# Altium PCB MP3_Player.PcbDoc
Units mil, origin at the board's own origin, x right, y up, seen from the top; angles counter-clockwise.
Board outline 2362.2 x 984.25 mil, 4 copper layers (Top Layer, Int1 (GND), Int2 (PWR), Bottom Layer), stack 62.449 mil thick; 70 components, 45 nets, 191 pads, 75 vias.
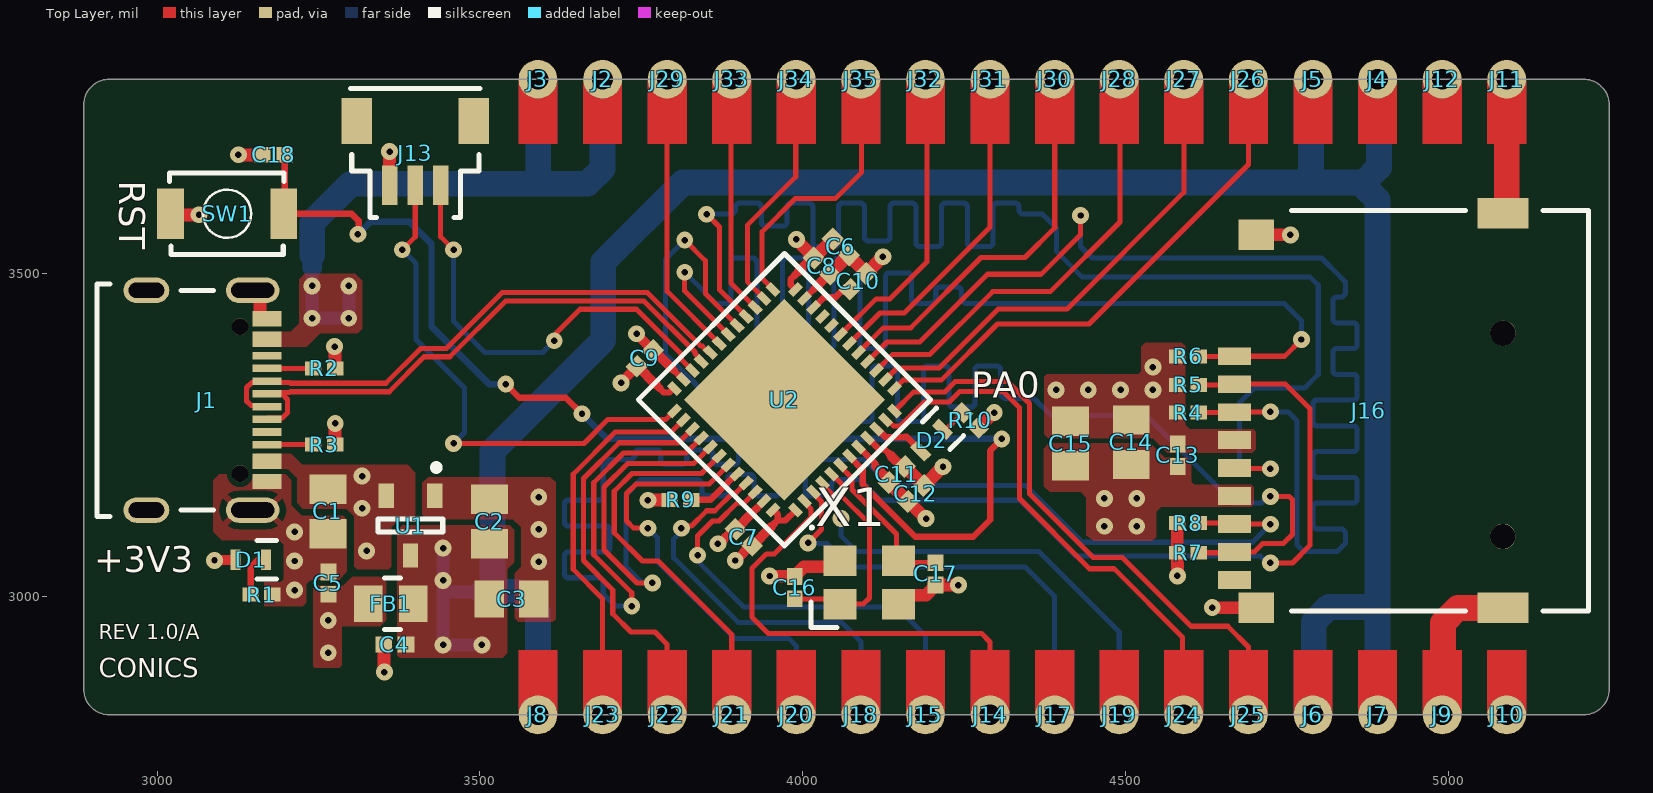
[diagram p0: Top Layer view]
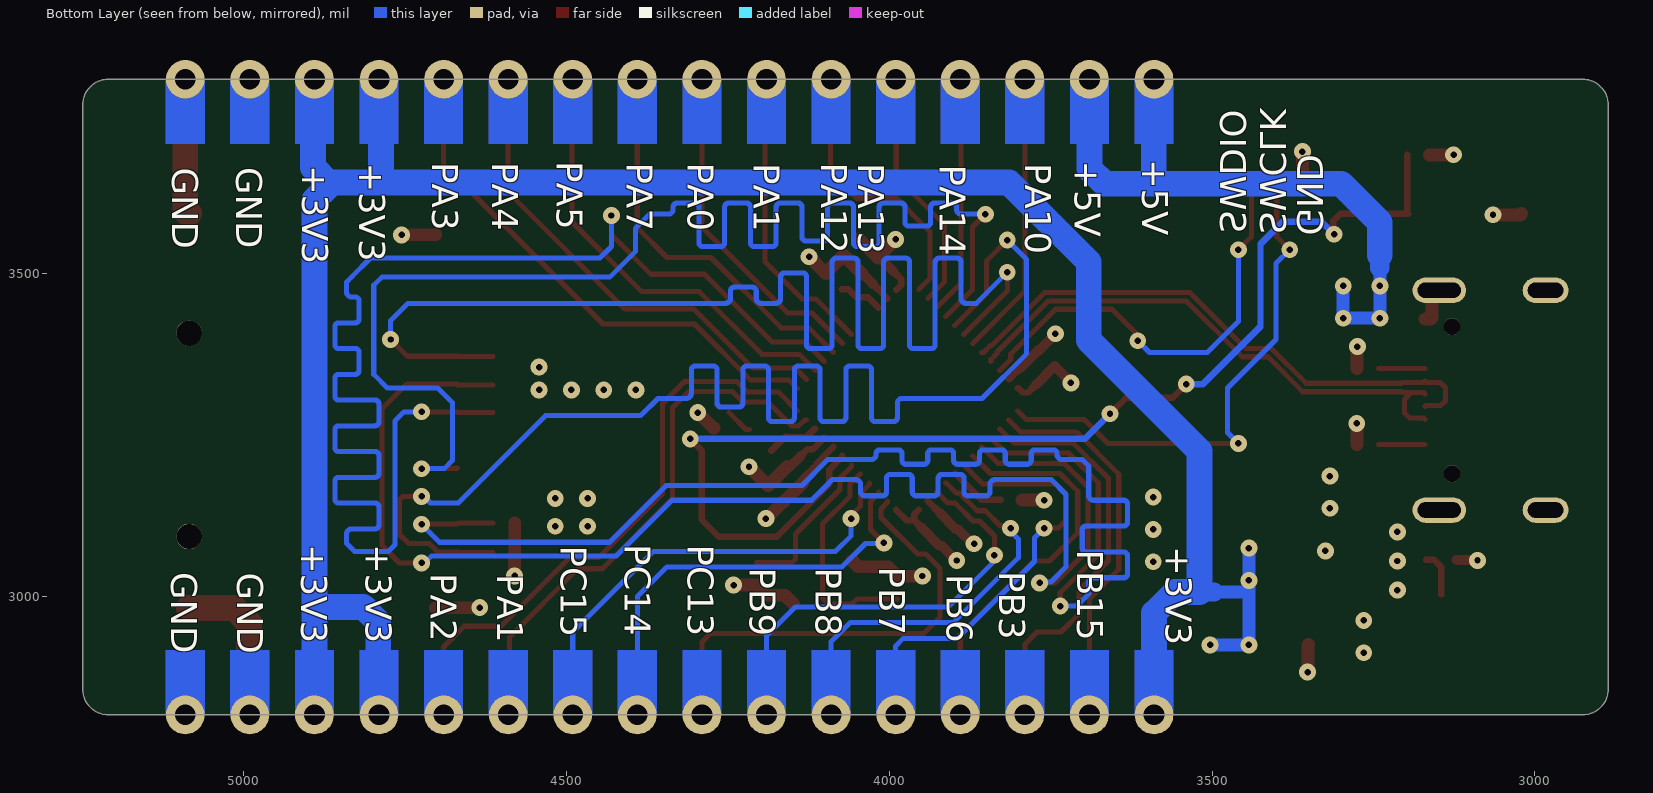
[diagram p1: Bottom Layer view, seen from below]
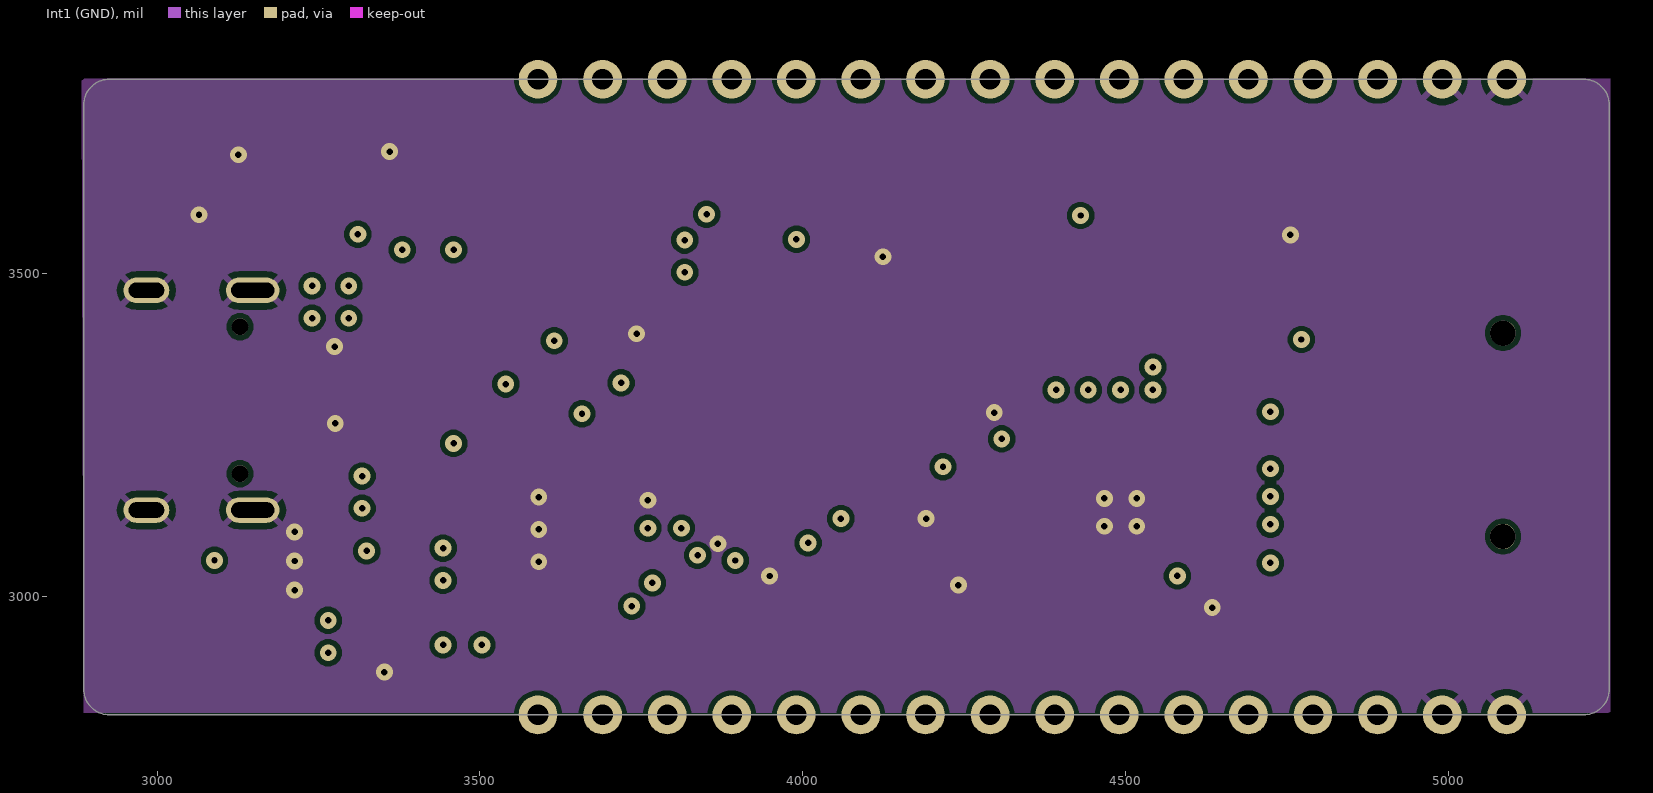
[diagram p2: Int1 (GND)]
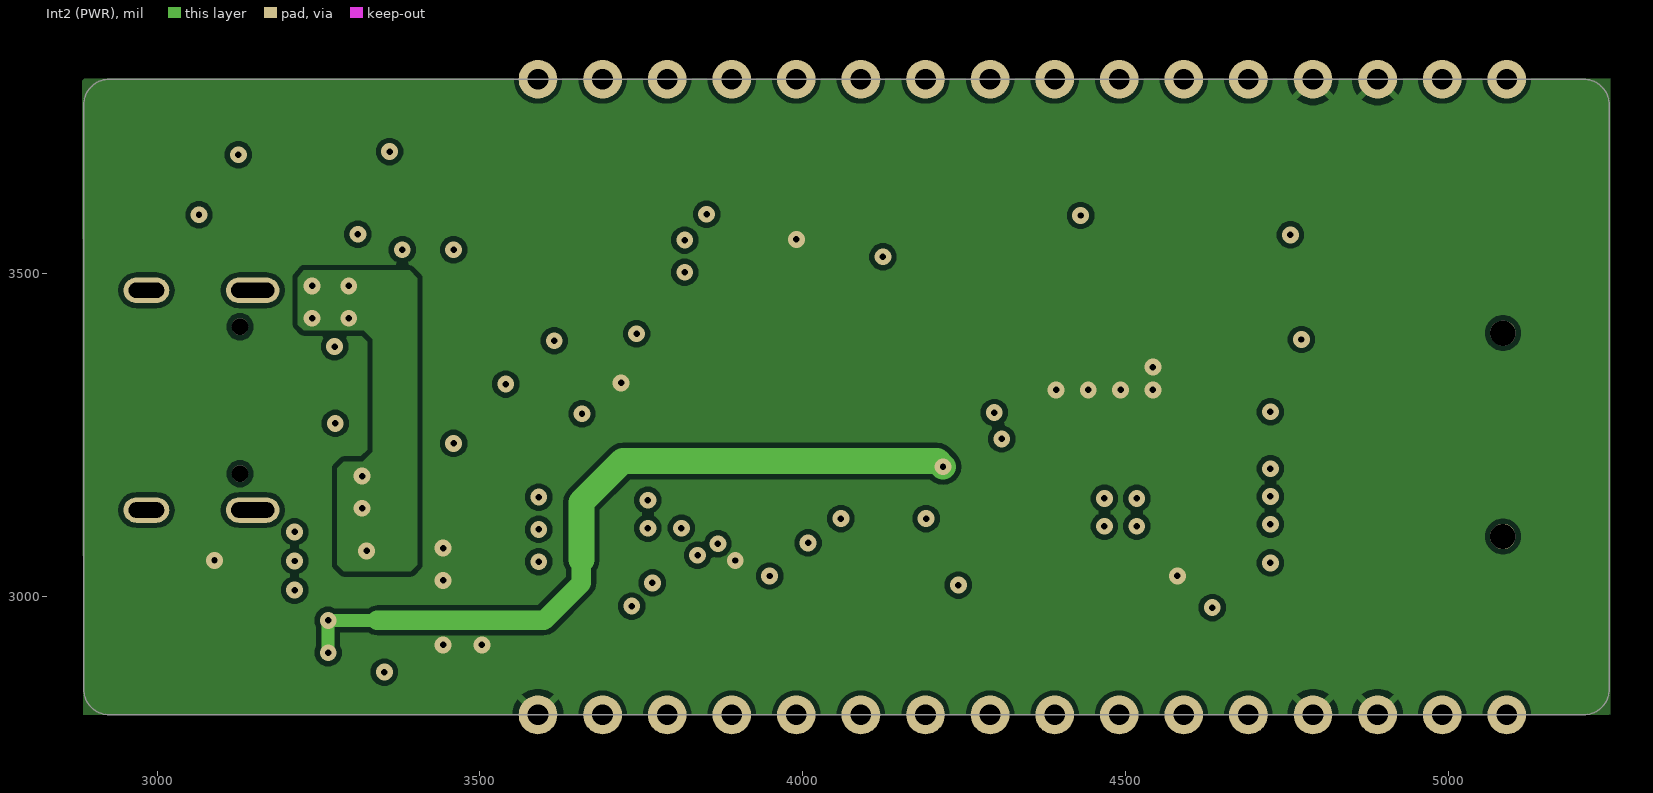
[diagram p3: Int2 (PWR)]

## Layer stack, top to bottom
Top Solder: solder mask 1.2, SM-001, Dk 3.8
Top Layer: signal copper 1.378
Dielectric 2: prepreg 8.2835, 7628, Dk 4.4
Int1 (GND): signal copper 0.5984
Dielectric 3: core 41.9291, Core-039, Dk 4.6
Int2 (PWR): signal copper 0.5984
Dielectric 5: prepreg 8.2835, 7628, Dk 4.4
Bottom Layer: signal copper 1.378
Bottom Solder: solder mask 1.2, SM-001, Dk 3.8

## Board outline
2886.47,2856.8 2886.47,3761.05 cw(c2926.47,3761.05) 2926.47,3801.05 5208.67,3801.05 cw(c5208.67,3761.05) 5248.67,3761.05 5248.67,2856.8 cw(c5208.67,2856.8) 5208.67,2816.8 2926.47,2816.8 cw(c2926.47,2856.8)

## Design rules (kind name [scope] priority, off if disabled: settings)
Clearance USBBus [InNet('USB*')] p1: gap=5 ignorepadtopadclearanceinfootprint=FALSE
Clearance [All] p2: gap=7.87 ignorepadtopadclearanceinfootprint=TRUE
DiffPairsRouting [InNet('USB*')] p1: maxlimit=10 minlimit=5 mostfreqgap=10 toplayer_maxgap=5 toplayer_prefgap=5 toplayer_minwidth=8.02 toplayer_maxwidth=8.02 toplayer_prefwidth=8.02 bottomlayer_maxgap=5 bottomlayer_prefgap=5 bottomlayer_minwidth=8.02 bottomlayer_maxwidth=8.02 bottomlayer_prefwidth=8.02 impedanceprofiledriven=TRUE impedanceprofileid={C55F2798-AC22-4EFC-BF2A-CBAC94E6BBA1} impedanceprofilevalue=90.000000 maxuncoupledlength=500
MinimumSolderMaskSliver [InPadClass('All Pads') vs InPadClass('All Pads')] p1: minsoldermaskwidth=4
PlaneClearance [All] p1: clearance=10
PlaneConnect [All] p1: planeconnectstyle=Direct reliefexpansion=20 reliefentries=4 reliefconductorwidth=10 reliefairgap=10
PolygonConnect [All] p1: thpad.connectstyle=Relief thpad.reliefconductorwidth=10 thpad.reliefentries=4 thpad.polygonreliefangle="45 Angle" thpad.airgapwidth=10 smdpad.connectstyle=Direct smdpad.reliefconductorwidth=10 smdpad.reliefentries=4 smdpad.polygonreliefangle="90 Angle" smdpad.airgapwidth=10 via.connectstyle=Direct via.reliefconductorwidth=10 via.reliefentries=4 via.polygonreliefangle="90 Angle" via.airgapwidth=10
RoutingVias [All] p1: holewidth=26 width=26 viastyle="Through Hole" minholewidth=10 minwidth=26 maxholewidth=28 maxwidth=30
SilkToSolderMaskClearance [IsPad] p1: minsilkscreentomaskgap=6 clearancetoexposedcopper=TRUE
SolderMaskExpansion [All] p1: expansion=0 istentingtop=FALSE useseparateexpansions=TRUE expansionbottom=0 istentingbottom=FALSE
SupplyNets "Schematic Supply Nets_3" [InNet('+5')] p1: voltage=0.000
SupplyNets "Schematic Supply Nets_2" [InNet('+3V3')] p2: voltage=0.000
SupplyNets "Schematic Supply Nets_1" [InNet('GND')] p3: voltage=0.000
SupplyNets "Schematic Supply Nets" [InNet('+3V3A')] p4: voltage=0.000
UnRoutedNet [All] p1: checkbadconnections=TRUE
Width [All] p1: maxlimit=40 minlimit=5 preferedwidth=7.87
24 further rules are at their usual default settings.

## Classes and differential pairs
net class "SD Bus": SD_CLK SD_CMD SD_D0 SD_D1 SD_D2 SD_D3
differential pair USB_D: +USB_D_P -USB_D_N

## Components (designator, comment, footprint, x,y, rotation, side; value= is the part's Value field where it differs from the comment)
C1 "10u" CAP_MLCC_0805 3264.47,3131.8 r90 top
C2 "47u" CAP_MLCC_0805 3515,3116 r270 top
C3 "10u" CAP_MLCC_0805 3549,2996 r180 top
C4 "2p7" CAP_MLCC_0402#1 3368.28,2925.69 r0 top
C5 "2p7" CAP_MLCC_0402#1 3265.47,3020.8 r270 top
C6 "2u2" CAP_MLCC_0402#1 4058.86,3541.31 r135 top
C7 "100n" CAP_MLCC_0402#1 3908.47,3091.8 r315 top
C8 "100n" CAP_MLCC_0402#1 4029.33,3511.78 r135 top
C9 "100n" CAP_MLCC_0402#1 3755.47,3368.8 r225 top
C10 "2u2" CAP_MLCC_0402#2 4085.47,3488.08 r225 top
C11 "100n" CAP_MLCC_0402#1 4145.44,3188.98 r45 top
C12 "2u2" CAP_MLCC_0402#1 4174.97,3159.45 r45 top
C13 "100n" CAP_MLCC_0402#1 4580.47,3218.8 r90 top
C14 "47u" CAP_MLCC_0805 4508.47,3238.8 r90 top locked
C15 "47u" CAP_MLCC_0805 4414.47,3236.8 r90 top locked
C16 "12p" CAP_MLCC_0402#1 3987.47,3013.8 r270 top
C17 "12p" CAP_MLCC_0402#1 4205.51,3035.09 r90 top
C18 "2u2" CAP_MLCC_0402#1 3180.38,3683.91 r180 top
D1 "P0603P1R09G12" LED_0603 3145,3057 r180 top
D2 "P0603P1N46G12" LED_0603 4199.47,3242.08 r225 top
FB1 "BLM21PG331SN1D" FBEAD_0805 3362,2989 r180 top
J1 "GT-USB-7010ASV" CONN_CH_USB_SMD_USB 3077,3304 r270 top
J2 "Castellated Pad" CPad 3689.85,3801 r0 top
J3 "Castellated Pad" CPad 3589.85,3801 r0 top
J4 "Castellated Pad" CPad 4889.85,3801 r0 top
J5 "Castellated Pad" CPad 4789.85,3801 r0 top
J6 "Castellated Pad" CPad 4789.85,2816.75 r180 top
J7 "Castellated Pad" CPad 4889.85,2816.75 r180 top
J8 "Castellated Pad" CPad 3589.85,2816.75 r180 top
J9 "Castellated Pad" CPad 4989.85,2816.75 r180 top
J10 "Castellated Pad" CPad 5089.85,2816.75 r180 top
J11 "Castellated Pad" CPad 5089.85,3801 r0 top
J12 "Castellated Pad" CPad 4989.85,3801 r0 top
J13 "DAP SWD" CONN_JST_3P 3399.85,3686.75 r180 top
J14 "Castellated Pad" CPad 4289.85,2816.75 r180 top
J15 "Castellated Pad" CPad 4189.85,2816.75 r180 top
J16 "TF-01A" CONN_CH_SMD_SD_CARD 4876.32,3287.85 r90 top
J17 "Castellated Pad" CPad 4389.85,2816.75 r180 top
J18 "Castellated Pad" CPad 4089.85,2816.75 r180 top
J19 "Castellated Pad" CPad 4489.85,2816.75 r180 top
J20 "Castellated Pad" CPad 3989.85,2816.75 r180 top
J21 "Castellated Pad" CPad 3889.85,2816.75 r180 top
J22 "Castellated Pad" CPad 3789.85,2816.75 r180 top
J23 "Castellated Pad" CPad 3689.85,2816.75 r180 top
J24 "Castellated Pad" CPad 4589.85,2816.75 r180 top
J25 "Castellated Pad" CPad 4689.85,2816.75 r180 top
J26 "Castellated Pad" CPad 4689.85,3801 r0 top
J27 "Castellated Pad" CPad 4589.85,3801 r0 top
J28 "Castellated Pad" CPad 4489.85,3801 r0 top
J29 "Castellated Pad" CPad 3789.85,3801 r0 top
J30 "Castellated Pad" CPad 4389.85,3801 r0 top
J31 "Castellated Pad" CPad 4289.85,3801 r0 top
J32 "Castellated Pad" CPad 4189.85,3801 r0 top
J33 "Castellated Pad" CPad 3889.85,3801 r0 top
J34 "Castellated Pad" CPad 3989.85,3801 r0 top
J35 "Castellated Pad" CPad 4089.85,3801 r0 top
R1 "100R" RES_SMD_0402 3162,3003.13 r0 top
R2 "5k1" RES_SMD_0402 3258.99,3353.2 r180 top
R3 "5k1" RES_SMD_0402 3258.99,3235.09 r180 top
R4 "47k" RES_SMD_0402 4596.47,3284.8 r180 top
R5 "47k" RES_SMD_0402 4596.47,3327.8 r180 top
R6 "47k" RES_SMD_0402 4596.47,3371.8 r180 top
R7 "47k" RES_SMD_0402 4596.47,3067.8 r180 top
R8 "47k" RES_SMD_0402 4596.47,3113.8 r180 top
R9 "10k" RES_SMD_0402 3810.8,3149.61 r0 top
R10 "100R" RES_SMD_0402 4259.47,3272.8 r135 top
SW1 "TS-1088-AR02016" SW_SMD_SPST 3108.47,3592.8 r0 top
U1 "HT7533S" HT7533S_SOT23 3392.47,3109.8 r270 top
U2 "STM32F411CEU6" STM32F411CEU6_QFPN48 3971.47,3304.8 r135 top
X1 "XC32M4-8.000-F12LJDT" XTAL_SMD_HCL 4102.6,3021.81 r0 top

## Footprints (in the part's own frame and the unit in brackets; to place one, negate y for a bottom-side part, rotate by r counter-clockwise, add the part's x,y. Pads: shape width x height; smd on the part's side, far side on the other; paste and mask are expansions set on the pad)
CAP_MLCC_0402#1 [mm] "MLCC Capacitor 0402 SMD"
  rect 0.66x0.62 smd: 1(-0.44,0) 2(0.44,0)
  body extent -0.53,-0.28 0.53,0.28, height 0.55
CAP_MLCC_0402#2 [mm] "MLCC Capacitor 0402 SMD"
  rect 0.66x0.62 smd mask+0.05: 1(-0.44,0)
  rect 0.66x0.62 smd: 2(0.44,0)
  body extent -0.53,-0.28 0.53,0.28, height 0.55
CAP_MLCC_0805 [mm]
  rect 1.15x1.45 smd: 1(-0.875,0) 2(0.875,0)
  body extent -1.1,-0.7 1.1,0.7, height 0.65
CONN_CH_SMD_SD_CARD [mm]
  rect 0.7x1.3 smd: 1(2.14,5.275) 2(1.04,5.275) 3(-0.06,5.275) 4(-1.16,5.275) 5(-2.26,5.275) 6(-3.36,5.275) 7(-4.46,5.275) 8(-5.56,5.275) 9(-6.66,5.275)
  rect 1.2x1.4 smd paste+0: 10(-7.76,4.425) 13(6.92,4.425)
  rect 1.2x2 smd: 11(-7.76,-5.275) 12(7.76,-5.275)
  round 1 hole 1 unplated: ""(-4.95,-5.275) ""(3.05,-5.275)
  silkscreen extent -7.87,-8.64 7.87,3.05, body extent -8.1,-9.53 8,5.67, height 2
CONN_CH_USB_SMD_USB [mm]
  rect 0.6x1.15 smd: 1(2.4,2.372) 2(-2.4,2.372) 11(-3.2,2.372) 12(3.2,2.372)
  rect 0.3x1.15 smd: 3(-1.75,2.372) 4(-1.25,2.372) 5(-0.75,2.372) 6(-0.25,2.372) 7(0.25,2.372) 8(0.75,2.372) 9(1.25,2.372) 10(1.75,2.372)
  oval 1x2.1 hole 0.6 slot 1.7 at 90 deg: 13(-4.32,1.807) 15(4.32,1.807)
  oval 1x1.8 hole 0.6 slot 1.4 at 90 deg: 14(-4.32,-2.372) 16(4.32,-2.372)
  round 0.65 hole 0.65 unplated: ""(-2.89,1.308) ""(2.89,1.308)
  silkscreen extent -4.57,-4.32 4.57,0.25, body extent -4.47,-4.97 4.47,2.93, height 3.16
CONN_JST_3P [mm]
  rect 0.6x1.55 smd paste-2539.97: 1(-1,1.262) 2(0,1.262) 3(1,1.262)
  rect 1.2x1.8 smd: 4(2.3,-1.262) 5(-2.3,-1.262)
  silkscreen extent -2.54,-2.54 2.54,2.54, body extent -2.49,-1.72 2.51,1.89, height 4.25
CPad [mil]
  round 60 hole 32 mask+0: 1(0,0)
  Top Layer region: -30,-100 30,-100 30,0 27.03,-13.02 18.7,-23.45 6.68,-29.25 -6.68,-29.25 -18.7,-23.45 -27.03,-13.02 -30,0 -30,0
  Bottom Layer region: -30,-100 30,-100 30,0 27.03,-13.02 18.7,-23.45 6.68,-29.25 -6.68,-29.25 -18.7,-23.45 -27.03,-13.02 -30,0 -30,0
FBEAD_0805 [mm]
  rect 1.13x1.43 smd: 1(-0.885,0) 2(0.885,0)
  silkscreen extent -0.38,-1.02 0.25,1.02, body extent -1.1,-0.7 1.1,0.7, height 0.55
HT7533S_SOT23 [mm] "SOT23, 3-Leads, Body 2.90x2.40mm, Pitch 0.95mm, IPC Medium Density"
  rect 0.95x0.6 smd: 1(-1.175,0.95) 2(-1.175,-0.95) 3(1.175,0)
  silkscreen extent -2.41,-1.27 0.25,1.27, body extent -1.25,-1.5 1.25,1.5, height 1.1
LED_0603 [mm]
  rect 0.4x0.8 smd: 1(-0.6,0) 2(0.6,0)
  silkscreen extent -1.02,-0.76 -0.25,0.76, body extent -0.82,-0.37 0.82,0.36, height 0.68
RES_SMD_0402 [mm] "Carbon Resistor SMD 0402"
  rect 0.65x0.55 smd: 1(-0.425,0) 2(0.425,0)
  body extent -0.55,-0.28 0.55,0.28, height 0.35
STM32F411CEU6_QFPN48 [mm]
  rect 0.55x0.3 smd: 1(-3.375,2.75) 2(-3.375,2.25) 3(-3.375,1.75) 4(-3.375,1.25) 5(-3.375,0.75) 6(-3.375,0.25) 7(-3.375,-0.25) 8(-3.375,-0.75) 9(-3.375,-1.25) 10(-3.375,-1.75) 11(-3.375,-2.25) 12(-3.375,-2.75) 25(3.375,-2.75) 26(3.375,-2.25) 27(3.375,-1.75) 28(3.375,-1.25) 29(3.375,-0.75) 30(3.375,-0.25) 31(3.375,0.25) 32(3.375,0.75) 33(3.375,1.25) 34(3.375,1.75) 35(3.375,2.25) 36(3.375,2.75)
  rect 0.3x0.55 smd: 13(-2.75,-3.375) 14(-2.25,-3.375) 15(-1.75,-3.375) 16(-1.25,-3.375) 17(-0.75,-3.375) 18(-0.25,-3.375) 19(0.25,-3.375) 20(0.75,-3.375) 21(1.25,-3.375) 22(1.75,-3.375) 23(2.25,-3.375) 24(2.75,-3.375) 37(2.75,3.375) 38(2.25,3.375) 39(1.75,3.375) 40(1.25,3.375) 41(0.75,3.375) 42(0.25,3.375) 43(-0.25,3.375) 44(-0.75,3.375) 45(-1.25,3.375) 46(-1.75,3.375) 47(-2.25,3.375) 48(-2.75,3.375)
  rect 5.6x5.6 smd: 49(0,0)
  silkscreen extent -4.37,-4.06 4.06,4.06, body extent -3.55,-3.55 3.55,3.55, height 0.6
SW_SMD_SPST [mm]
  rect 1.05x2 smd: 1(-2.225,0) 2(2.225,0)
  round 0 on Top Overlay: H(0,0)
  silkscreen extent -2.26,-1.6 2.24,1.6, body extent -2.5,-1.45 2.5,1.45, height 2
XTAL_SMD_HCL [mm]
  rect 1.3x1.2 smd: 1(-1.15,-0.85) 2(1.15,-0.85) 3(1.15,0.85) 4(-1.15,0.85)
  silkscreen extent -2.29,-1.78 -1.27,-0.76, body extent -2,-1.25 2,1.25, height 0.81

## Part data
C1 C2 C3 C14 C15: library part "Cap MLCC 0805", "Multilayer  Ceramic Capacitor"
C4 C5 C6 C7 C8 C9 C10 C11 C12 C13 C16 C17 C18: library part "Cap MLCC 0402", "Multilayer  Ceramic Capacitor"
D1: library part "Diode LED R", "20mA 350mcd 621nm Red 2V 0603 LED Indication - Discrete ROHS", Manufacturer 1=Silverlight, ComponentLink1Description="Product Link", ComponentLink1URL=https://www.lcsc.com/product-detail/C5123549.html, ComponentLink2Description=Datasheet, ComponentLink2URL=https://www.lcsc.com/datasheet/C5123549.pdf, Manufacturer Part Number 1=P0603P1R09G12
D2: library part "Diode LED G", "1200mcd 518nm~524nm Green 3V 0603 LED Indication - Discrete ROHS", Manufacturer 1=Silverlight, ComponentLink1Description=Datasheet, ComponentLink1URL=https://www.lcsc.com/datasheet/C5123548.pdf, ComponentLink2Description="Product Link", ComponentLink2URL=https://www.lcsc.com/product-detail/C5123548.html, Manufacturer Part Number 1=P0603P1N46G12
FB1: library part "Filter Ferrite Bead 0805", "70mΩ ±25% 330Ω@100MHz 0805 Ferrite Beads and Chips RoHS", Manufacturer 1=muRata, Manufacturer Part Number 1=BLM21PG331SN1D
J1: library part "Connector USB-C CH", "USB 2.0 1 16P -40℃~+85℃ Type-C SMD USB, DVI, HDMI Connector Assemblies ROHS", Manufacturer 1=G-Switch, ComponentLink1Description=Datasheet, ComponentLink1URL=https://atta.szlcsc.com/upload/public/pdf/source/20230327/DF227B64686AC8FA0AD1775797F2C3F1.pdf, ComponentLink2Description="Product Link", ComponentLink2URL=https://www.lcsc.com/product-detail/C2988369.html, Manufacturer Part Number 1=GT-USB-7010ASV
J13: "Connector Header 3 position 1mm Pitch 1A Surface Mount,Vertical -25℃~+85℃", Manufacturer 1=JST, Manufacturer Part Number 1=BM03B-SRSS-TB(LF)(SN), ComponentLink1Description=Datasheet, ComponentLink1URL=https://www.lcsc.com/datasheet/C160389.pdf, ComponentLink2Description="Product Link", ComponentLink2URL=https://www.lcsc.com/product-detail/C160389.html
J16: library part "Connector SD Card CH", "Push-Push 1.85mm Connector and Ejector MicroSD Card (TF Card) SMD PC Card Sockets ROHS", Manufacturer 1="Korean Hroparts Elec", ComponentLink1Description=Datasheet, ComponentLink1URL=https://www.lcsc.com/datasheet/C91145.pdf, ComponentLink2Description="Product Link", ComponentLink2URL=https://www.lcsc.com/product-detail/C91145.html, Manufacturer Part Number 1=TF-01A
R1 R2 R3 R4 R5 R6 R7 R8 R9 R10: library part "Resistor 0402", "General Purpose SMD Carbon Resistor"
SW1: library part "Switch SMD SPST", "Without Bracket 4mm 12V 3mm Round Button SPST 50mA SMD,4x3mm Tactile Switches ROHS", Manufacturer 1=XUNPU, ComponentLink1Description=Datasheet, ComponentLink1URL=https://item.szlcsc.com/datasheet/TS-1088-AR02016/763484.html?lcsc_vid=T1EMVlBfE1BXVVADFQQNUlMFT1RXUAZeFlhfBlAAQVExVlNQR1lZUlJWR1BfVTsOAxUeFF5JWBEcCEoDFhIXAgAHWQIBCks%3D, ComponentLink2Description="Product Link", ComponentLink2URL=https://www.lcsc.com/product-detail/C720477.html, Manufacturer Part Number 1=TS-1088-AR02016
U1: library part "Regulator LDO HT7533S", "Linear Voltage Regulator IC Positive Fixed 1 Output 100mA SOT-23", Manufacturer 1=UMW, ComponentLink1Description="Product Link", ComponentLink1URL=https://www.lcsc.com/product-detail/C347215.html, ComponentLink2Description=Datasheet, ComponentLink2URL=https://www.lcsc.com/datasheet/C347215.pdf, Manufacturer Part Number 1=HT7533S
U2: library part "MCU STM32F411CEU6", "ARM Cortex-M4 32 Bit 100MHz 36 UFQFPN-48(7x7) Microcontrollers RoHS", Manufacturer 1=ST, ComponentLink1Description=Datasheet, ComponentLink1URL=https://www.lcsc.com/datasheet/C60420.pdf, ComponentLink2Description="Product Link", ComponentLink2URL=https://www.lcsc.com/product-detail/C60420.html, Manufacturer Part Number 1=STM32F411CEU6
X1: library part "Crystal SMD 8MHz", "Crystal Oscillator 12pF SMD3225-4P Crystals RoHS", Manufacturer 1=HCI, ComponentLink1Description=Datasheet, ComponentLink1URL=https://www.lcsc.com/datasheet/C2842191.pdf, ComponentLink2Description="Product Link", ComponentLink2URL=https://www.lcsc.com/product-detail/C2842191.html, Manufacturer Part Number 1=XC32M4-8.000-F12LJDT

## Via types
v1: diameter 26, hole 10, Top Layer to Bottom Layer, tented both sides, 74 vias
v2: diameter 26, hole 10, Top Layer to Bottom Layer, 1 vias

## Nets (pads, with @x,y where several pads share a name; then routed paths per layer and width w, separated by ;. In a path a pad name is that pad's centre, name@x,y a point inside that pad or via, vN(x,y) a via of type N, cw(c..) or ccw(c..) an arc to the next point about the centre after c; other vN are vias at no path point)
+3V3: C2.2 C3.2 C4.2 C6.2 C7.2 C8.2 C9.2 C13.2 C14.2 C15.2 D1.2 FB1.1 J4.1 J5.1 J6.1 J7.1 J8.1 J16.4 R4.2 R5.2 R6.2 R7.2 R8.2 U1.3 U2.1 U2.24 U2.36 U2.48 | length 4119.2
  Top Layer w10: 3777.85,3322.75 3784.71,3315.89 3792.99,3315.89 3799.49,3322.38 3800.77,3322.38 U2.36 ; U2.48 3954.31,3134.29 3960.85,3127.75 3960.85,3117.75 ; 3955.85,3112.75 3960.85,3117.75 ; 3986.85,3496.75 3980.99,3490.89 3980.99,3482.61 3988.29,3475.31 U2.24 ; U2.1 3988.86,3133.76 3972.85,3117.75 3960.85,3117.75
  Top Layer w12: 3772.85,3327.75 3777.85,3322.75 ; 3949.85,3106.75 3955.85,3112.75 ; 3986.85,3496.75 3993.85,3503.75
  Top Layer w15: v1(3089,3056) 3089.5,3056.5 3121,3056.5 3121.38,3056.87 D1.2 ; v1(3718.47,3330.8) 3718.47,3331.3 3743.22,3356.05 C9.2 ; C9.2@3743.63,3356.97 3772.85,3327.75 ; v1(3895.47,3055.8) 3896.21,3055.8 3919.97,3079.55 C7.2 ; C7.2@3921.68,3078.58 3949.85,3106.75 ; 3993.85,3503.75 4014.13,3524.03 C8.2
  Top Layer w20: v1(3990,3553) 3990,3552.06 4017.08,3524.97 C8.2 C6.2 C6.2@4046.53,3553.56 ; R8.2 R7.2 4579.87,3067.67 4579.87,3032.13 v1(4580,3032)
  Bottom Layer w20: v1(3443,3075) v1(3443,3025) ; v1@3444.62,3025 v1(3443,3025) ; 3497.22,3007.04 3443.96,3007.04 3443,3008 ; v1(3503,2925) v1(3443,2925) 3443,3008 ; 3443,3008 v1(3443,3025)
  Bottom Layer w30: 3497.22,3007.04 3519.22,3007.04
  Bottom Layer w40: J8.1 3589.85,2974.41 3557.22,3007.04 3519.22,3007.04 3519.22,3225.22 3691,3397 3691,3518 3814,3641 4783,3641 ; 4787,3760 4787,3645 4783,3641 ; 4791,2857 4791,2960.57 4814.43,2984 4890,2984 ; 4889.85,3751.87 4891.85,3753.87 ; 4893.85,3762.87 4891.85,3760.87 4891.85,3753.87 ; 4896,2866 4890,2872 4890,2984 ; 4783,3641 4868.42,3641 ; 4868.42,3641 4891.85,3664.43 4891.85,3753.87 ; 4868.42,3641 4868.42,3635.58 4890,3614 4890,2984
  other v1: 4392,3320 4442,3320 4492,3320 4542,3320 4542,3355.19
+3V3A: C5.2 C11.2 C12.2 FB1.2 U2.9 | length 1341.5
  Top Layer w10: U2.9 4118.12,3227.75 4126.85,3227.75 4132.85,3221.75
  Top Layer w12: 4132.85,3221.75 4136.85,3217.75
  Top Layer w15: 4136.85,3217.75 4153.37,3201.23 C11.2
  Top Layer w20: C11.2 C12.2 4187.46,3171.7 4216.76,3201 v1(4217,3201)
  Int2 (PWR) w20: v1@3265.5,2913.5 v1(3265,2913) v2(3265,2963) 3341,2963
  Int2 (PWR) w30: 3341,2963 3599,2963 3657,3021 3657,3057
  Int2 (PWR) w40: 3657,3057 3657,3146 3721,3210 4208,3210 v1(4217,3201)
+5: C1.2 J1.1 J1.2 J2.1 J3.1 U1.2 | length 1040.1
  Bottom Layer w20: 3240.22,3509.04 3240.22,3481.22 v1(3240,3481) v1(3240,3431) v1(3297,3431) v1(3297,3481)
  Bottom Layer w30: 3240.22,3509.04 3240.22,3529.04
  Bottom Layer w40: 3240.22,3529.04 3240.22,3579.22 3300.04,3639.04 3590.22,3639.04 ; J3.1 3590.22,3800.63 3590.22,3639.04 ; J2.1 3689.85,3662.47 3666.42,3639.04 3590.22,3639.04
  other v1: 3324.47,3070.54 3317.47,3136.54 3317.47,3186.54
GND: C1.1 C2.1 C3.1 C4.1 C5.1 C6.1 C7.1 C8.1 C9.1 C10.1 C11.1 C12.1 C13.1 C14.1 C15.1 C16.1 C17.1 C18.2 J1.11 J1.12 J1.13 J1.14 J1.15 J1.16 J9.1 J10.1 J11.1 J12.1 J13.3 J16.6 J16.10 J16.11 J16.12 J16.13 R1.2 R2.1 R3.1 R9.1 R10.1 SW1.1 U1.1 U2.8 U2.23 U2.35 U2.47 X1.2 X1.4 | length 1705.2
  Top Layer w10: 3800.85,3349.75 3814.48,3336.12 U2.35 ; 3928.85,3136.75 3940.15,3148.04 U2.47 ; U2.23 4002.78,3461.68 4016.85,3475.75 ; U2.8 4111.85,3206.17 4111.85,3201.75
  Top Layer w12: 3795.85,3354.75 3800.85,3349.75 ; 3921.85,3129.75 3928.85,3136.75 ; 4016.85,3475.75 4024.85,3483.75 ; 4111.85,3201.75 4115.85,3197.75
  Top Layer w15: v1(3742.47,3406.8) 3742.47,3406.55 3767.71,3381.3 C9.1 ; C9.1@3768.63,3381.97 3795.85,3354.75 ; v1(3868.47,3081.8) 3871.22,3081.8 3893.47,3104.05 C7.1 ; C7.1 3921.85,3129.75 ; 4024.85,3483.75 4040.63,3499.53 C8.1 ; 4115.85,3197.75 4133.19,3180.41 C11.1
  Top Layer w20: SW1.1 3022.67,3591 v1(3065,3591) ; v1(3126,3684) v1(3126,3684) 3163.01,3683.96 C18.2 ; J1.13 3150.34,3474.08 3159.28,3465.13 3159.28,3431.78 3161.09,3429.97 J1.11 ; v1(3275,3387) 3275.36,3386.64 3275.36,3353.56 R2.1 ; R3.1 3275.86,3235.23 3275.86,3267.86 v1(3276,3268) ; C4.1 3351.48,2925.17 3351.48,2883.52 v1(3352,2883) ; v1(3360,3689) 3360.24,3688.76 3360.24,3637.28 J13.3 J13.3@3360.44,3637 ; v1(3760,3149) 3760.3,3149.3 3793.76,3149.3 R9.1 ; v1(3948.47,3031.8) 3948.8,3031.46 3987.13,3031.46 C16.1 ; C16.1@3987.47,3031.91 4001.73,3046.18 4048.23,3046.18 X1.4 ; C8.1 C6.1 4071.11,3528 4097.72,3501.39 C10.1 4098.02,3500.33 4123.7,3526 v1(4124,3526) ; C11.1 C12.1 4163.56,3147.2 4190.01,3120.75 v1(4190.85,3120.75) ; X1.2 4161.5,3001.97 4190.5,3001.97 4205.51,3016.98 C17.1 v1@4240.84,3017.76 ; R10.1 4271.97,3260.97 4295.8,3284.8 v1(4296.47,3284.8) ; v1(4634,2982.93) 4634.3,2982.63 4701.82,2982.63 J16.10 J16.10@4702.21,2982.24 ; J16.13 4702.26,3560.14 4754.86,3560.14 v1(4755,3560)
  Top Layer w40: J9.1@4991,2816.75 4991,2958.9 5014.43,2982.34 J16.11 ; J16.12 5086.23,3593.36 5089.85,3596.98 J11.1
  other v1: 3213,3010 4240.85,3017.75 3591,3054 3213,3055 3213,3100 3591,3104 4467,3108.89 4517,3108.89 4467,3152 4517,3152 3591,3154
NetC10_2: C10.2 U2.22 | length 68.3
  Top Layer w10: U2.22 4032.6,3463.37 4050.58,3463.37 4063.03,3475.83 C10.2
NetC16_2: C16.2 U2.5 X1.1 | length 339.1
  Top Layer w7.87: C16.2 4049.19,2996.48 X1.1 4093.45,2988.35 4103,2997.9 4103,3112.6 4060.29,3155.31 4060.29,3174.22 U2.5
NetC17_2: C17.2 U2.6 X1.3 | length 244.5
  Top Layer w7.87: U2.6 4058.46,3201.1 4076.04,3183.52 4076.04,3165.56 4144.85,3096.75 4144.85,3058.3 X1.3 4150.73,3052.42 C17.2
NetC18_1: C18.1 SW1.2 U2.7 | length 1879.2
  Top Layer w10: C18.1 3197.7,3594.44 SW1.2 3301.2,3592.8 3312,3582 3312,3562 v1(3311,3561) ; v1(3540,3329) 3561,3308 3633,3308 v1(3658,3283) ; U2.7 4072.38,3216.52 4092.85,3196.05 4092.85,3173.75 4173.85,3092.75 4263.75,3092.75 4290,3119 4290,3226 v1(4308,3244)
  Bottom Layer w10: v1(3311,3561) 3330,3580 3391,3580 3425,3546 3425,3418 3514,3329 v1(3540,3329) ; v1(3658,3283) 3697,3244 v1(4308,3244)
NetD1_1: D1.1 R1.1 | length 70.5
  Top Layer w10: R1.1 3145.27,3045.6 3156.47,3056.8 3168.42,3056.8 D1.1
NetD2_1: D2.1 R10.2 | length 42.2
  Top Layer w7.87: D2.1 4221.76,3258.76 R10.2
NetJ1_4: J1.4 R2.2 | length 71.9
  Top Layer w7.87: J1.4 R2.2
NetJ1_10: J1.10 R3.2 | length 71.9
  Top Layer w7.87: J1.10 R3.2
NetR9_2: R9.2 U2.44 | length 87.6
  Top Layer w10: R9.2 3856.75,3149.61 3897.11,3189.97 U2.44
PA0: D2.2 U2.10 | length 82.9
  Top Layer w10: U2.10 4115.42,3259.56 4128.03,3246.95 4157.31,3246.95 4157.48,3247.11 4161.02,3247.11 D2.2
PA1: J24.1 U2.11 | length 846.3
  Top Layer w7.87: U2.11 4130.84,3273.48 4140.57,3263.76 4150.35,3263.76 4187.84,3301.25 4226.48,3301.25 4242.48,3317.25 4310.48,3317.25 4335.25,3292.48 4335.25,3151.75 4444,3043 4482,3043 4588,2937 J24.1@4588,2816.75
PA2: J25.1 U2.12 | length 924.4
  Top Layer w7.87: U2.12 4171.58,3317 4219.96,3317 4235.96,3333 4317,3333 4351,3299 4351,3159 4449.5,3060.5 4494.5,3060.5 4601,2954 4658,2954 4690,2922 J25.1@4690,2816.75
PA3: J26.1 U2.13 | length 823.6
  Top Layer w7.87: U2.13 4142.2,3322.2 4155,3335 4214.27,3335 4301.27,3422 4443,3422 4689.85,3668.85 J26.1
PA4: J27.1 U2.14 | length 757
  Top Layer w7.87: U2.14 4145.94,3354 4211,3354 4302,3445 4409,3445 4589.85,3625.85 J27.1
PA5: J28.1 U2.15 | length 693.1
  Top Layer w7.87: U2.15 4139.1,3375 4197,3375 4294,3472 4383,3472 4491,3580 J28.1@4491,3801
PA7: J30.1 U2.17 | length 613.7
  Top Layer w7.87: U2.17 4124.42,3416 4167,3416 4276,3525 4344,3525 4390,3571 J30.1@4390,3801
PA10: J29.1 U2.31 | length 442.6
  Top Layer w7.87: J29.1 3789.85,3472.5 U2.31
PA15: J23.1 U2.38 | length 567
  Top Layer w8.02: J23.1@3689.85,2846.49 3689.85,2996.67 3644.41,3042.11 3644.41,3189.34 3710.07,3255 3796.39,3255 U2.38
PB0: J31.1 U2.18 | length 521.2
  Top Layer w7.87: U2.18 4119.58,3439 4157,3439 4289.85,3571.85 J31.1
PB1: J32.1 U2.19 | length 473
  Top Layer w7.87: U2.19 4113.75,3461 4135,3461 4192,3518 J32.1@4192,3811
PB3: J22.1 U2.39 | length 641.6
  Top Layer w8.02: J22.1 3789.85,2926.15 3771,2945 3734,2945 3705.75,2973.25 3705.75,3010.25 3660.31,3055.69 3660.31,3182.75 3715.55,3238 3807.23,3238 U2.39
PB6: J21.1 U2.42 | length 591.2
  Top Layer w8.02: U2.42 3843.05,3190.31 3735.31,3190.31 3708,3163 3708,3098.88 3751.88,3055 3776,3055 3889.85,2941.15 J21.1@3889.85,2846.49
PB7: J20.1 U2.43 | length 689.6
  Top Layer w7.87: 3726.99,3117.89 3726.99,3116.89 3737.99,3105.89 v1(3760,3105.89)
  Top Layer w8.02: 3726.99,3117.89 3726.99,3159.51 3741.89,3174.41 3855,3174.41 U2.43
  Bottom Layer w7.87: v1(3760,3105.89) 3774.85,3091.04 3774.85,3054.41 3894.01,2935.25 3978.01,2935.25 3989.85,2923.41 J20.1
PB8: J18.1 U2.45 | length 637.3
  Top Layer w7.87: v1(3811.99,3105.89) 3815.46,3109.36 3827.6,3109.36 3851.04,3132.8 3863.71,3132.8 3891.29,3160.37 3895.97,3160.37 3911.64,3176.05 U2.45
  Bottom Layer w7.87: v1(3811.99,3105.89) 3811.99,3100.98 3800,3088.99 3800,3060 3900,2960 4060,2960 4089.85,2930.15 J18.1
PB9: J15.1 U2.46 | length 679.6
  Top Layer w7.87: v1(3837,3064) 3837,3093.9 3860.15,3117.05 3870.23,3117.05 3897.81,3144.62 3908.73,3144.62 U2.46
  Bottom Layer w7.87: v1(3837,3064) 3840.47,3060.53 3840.47,3051.53 3908,2984 4145,2984 4189.85,2939.15 J15.1
PB12: J35.1 U2.25 | length 432.9
  Top Layer w7.87: U2.25 3937,3492.38 3937,3565 3988,3616 4050,3616 4091,3657 J35.1@4091,3801
PB13: J34.1 U2.26 | length 381.5
  Top Layer w7.87: U2.26 3914,3487.54 3914,3575 3989,3650 J34.1@3989,3801
PB14: J33.1 U2.27 | length 368.9
  Top Layer w7.87: J33.1@3889,3801 3889,3484.7 U2.27
PC13: J14.1 U2.2 | length 697.1
  Top Layer w7.87: U2.2 4002.78,3145.42 4012.51,3135.7 4012.51,3122.51 3956.12,3066.12 3943.86,3066.12 3921,3043.26 3921,2968.27 3946.47,2942.8 4276.8,2942.8 4289.85,2929.75 J14.1@4289.85,2846.49
PC14: J17.1 U2.3 | length 692.3
  Top Layer w7.87: v1(4008.04,3082.96) 4028.85,3103.76 4028.85,3147.2 4016.7,3159.34 U2.3
  Bottom Layer w7.87: v1(4008.04,3082.96) 4008.71,3082.29 4036.71,3082.29 4073,3046 4344,3046 4389.85,3000.15 J17.1
PC15: J19.1 U2.4 | length 714.7
  Top Layer w7.87: U2.4 4030.62,3173.26 4044.54,3159.34 4044.54,3153.77 4044.6,3153.72 4044.6,3139.9 4058.85,3125.65 v1(4058.85,3120.75)
  Bottom Layer w7.87: v1(4058.85,3120.75) 4058.85,3094.15 4083,3070 4365,3070 4489.85,2945.15 J19.1
SD_CLK: J16.5 U2.28 | length 2235.9
  Top Layer w7.87: v1(3851,3592) 3871,3572 3871,3474.86 U2.28 ; J16.5 4669.52,3198 v1(4724,3198)
  Bottom Layer w7.87: v1(3851,3592) 3884,3592 3887.94,3592 ccw(c3887.94,3599.87) 3895.81,3599.87 3895.81,3603.21 cw(c3901.79,3603.21) 3901.79,3609.19 3929.7,3609.19 cw(c3929.7,3603.21) 3935.69,3603.21 3935.69,3579.63 ccw(c3941.67,3579.63) 3941.67,3573.65 3969.58,3573.65 ccw(c3969.58,3579.63) 3975.56,3579.63 3975.56,3603.21 cw(c3981.54,3603.21) 3981.54,3609.19 4009.45,3609.19 cw(c4009.45,3603.21) 4015.43,3603.21 4015.43,3547.98 ccw(c4021.41,3547.98) 4021.41,3542 4049.33,3542 ccw(c4049.33,3547.98) 4055.31,3547.98 4055.31,3603.21 cw(c4061.29,3603.21) 4061.29,3609.19 4089.2,3609.19 cw(c4089.2,3603.21) 4095.18,3603.21 4095.18,3556.79 ccw(c4101.16,3556.79) 4101.16,3550.81 4129.07,3550.81 ccw(c4129.07,3556.79) 4135.06,3556.79 4135.06,3603.21 cw(c4141.04,3603.21) 4141.04,3609.19 4168.95,3609.19 cw(c4168.95,3603.21) 4174.93,3603.21 4174.93,3547.98 ccw(c4180.91,3547.98) 4180.91,3542 4208.82,3542 ccw(c4208.82,3547.98) 4214.8,3547.98 4214.8,3603.21 cw(c4220.78,3603.21) 4220.78,3609.19 4248.7,3609.19 cw(c4248.7,3603.21) 4254.68,3603.21 4254.68,3547.98 ccw(c4260.66,3547.98) 4260.66,3542 4288.57,3542 ccw(c4288.57,3547.98) 4294.55,3547.98 4294.55,3603.21 cw(c4300.53,3603.21) 4300.53,3609.19 4328.44,3609.19 cw(c4328.44,3603.21) 4334.43,3603.21 4334.43,3599.87 ccw(c4342.3,3599.87) 4342.3,3592 4370.96,3592 4374.13,3588.83 4393,3569.96 4393,3534 4432,3495 4785,3495 4798,3482 4798,3344 4777,3323 4699,3323 4676,3300 4676,3211 4689,3198 v1(4724,3198)
SD_CMD: J16.3 R4.1 U2.16 | length 2230.5
  Top Layer w7.87: U2.16 4130.26,3394 4181,3394 4286,3499 4369,3499 4430,3560 v1(4430,3590) ; R4.1 4667.96,3284.8 J16.3 4669.16,3286 v1(4724,3286)
  Bottom Layer w7.87: v1(4430,3590) 4430,3542 4448,3524 4803,3524 4832,3495 4840,3487 4840,3471.55 cw(c4832.13,3471.55) 4832.13,3463.68 4826.73,3463.68 ccw(c4826.73,3457.7) 4820.75,3457.7 4820.75,3429.78 ccw(c4826.73,3429.78) 4826.73,3423.8 4852.21,3423.8 cw(c4852.21,3417.82) 4858.19,3417.82 4858.19,3389.91 cw(c4852.21,3389.91) 4852.21,3383.93 4826.73,3383.93 ccw(c4826.73,3377.95) 4820.75,3377.95 4820.75,3350.04 ccw(c4826.73,3350.04) 4826.73,3344.06 4852.21,3344.06 cw(c4852.21,3338.07) 4858.19,3338.07 4858.19,3310.16 cw(c4852.21,3310.16) 4852.21,3304.18 4795.98,3304.18 ccw(c4795.98,3298.2) 4790,3298.2 4790,3270.29 ccw(c4795.98,3270.29) 4795.98,3264.31 4852.21,3264.31 cw(c4852.21,3258.33) 4858.19,3258.33 4858.19,3230.41 cw(c4852.21,3230.41) 4852.21,3224.43 4795.98,3224.43 ccw(c4795.98,3218.45) 4790,3218.45 4790,3190.54 ccw(c4795.98,3190.54) 4795.98,3184.56 4852.21,3184.56 cw(c4852.21,3178.58) 4858.19,3178.58 4858.19,3150.67 cw(c4852.21,3150.67) 4852.21,3144.69 4795.98,3144.69 ccw(c4795.98,3138.7) 4790,3138.7 4790,3110.79 ccw(c4795.98,3110.79) 4795.98,3104.81 4832.13,3104.81 cw(c4832.13,3096.94) 4840,3096.94 4840,3093 4840,3082 4828,3070 4775,3070 4765,3080 4765,3272 4751,3286 v1(4724,3286)
SD_D0: J16.7 R8.1 U2.40 | length 2231.9
  Top Layer w7.87: R8.1 4667.1,3113.8 J16.7 ; J16.7@4668.9,3112 v1(4724,3112)
  Top Layer w8.02: v1(3735,2985.12) 3735,3006 3676.21,3064.79 3676.21,3176.17 3722.14,3222.1 3819.17,3222.1 U2.40
  Bottom Layer w8.02: v1(3735,2985.12) 3709.88,2985.12 3691,3004 3691,3017.01 3691,3021.02 ccw(c3682.98,3021.02) 3682.98,3029.04 3637,3029.04 cw(c3637,3035.04) 3631,3035.04 3631,3063.06 cw(c3637,3063.06) 3637,3069.06 3695.1,3069.06 ccw(c3695.1,3075.07) 3701.1,3075.07 3701.1,3103.08 ccw(c3695.1,3103.08) 3695.1,3109.09 3637,3109.09 cw(c3637,3115.09) 3631,3115.09 3631,3143.11 cw(c3637,3143.11) 3637,3149.11 3682.98,3149.11 ccw(c3682.98,3157.13) 3691,3157.13 3691,3191 3691,3202 3701,3212 3728,3212 3732.01,3212 ccw(c3732.01,3220.02) 3740.04,3220.02 3740.03,3221.11 cw(c3746.04,3221.11) 3746.04,3227.11 3774.05,3227.11 cw(c3774.05,3221.11) 3780.06,3221.11 3780.06,3210.9 ccw(c3786.06,3210.9) 3786.06,3204.9 3814.08,3204.9 ccw(c3814.08,3210.9) 3820.08,3210.9 3820.08,3221.11 cw(c3826.08,3221.11) 3826.08,3227.11 3854.1,3227.11 cw(c3854.1,3221.11) 3860.1,3221.11 3860.1,3210.9 ccw(c3866.11,3210.9) 3866.11,3204.9 3894.12,3204.9 ccw(c3894.12,3210.9) 3900.13,3210.9 3900.13,3221.11 cw(c3906.13,3221.11) 3906.13,3227.11 3934.15,3227.11 cw(c3934.15,3221.11) 3940.15,3221.11 3940.15,3210.9 ccw(c3946.15,3210.9) 3946.15,3204.9 3974.17,3204.9 ccw(c3974.17,3210.9) 3980.17,3210.9 3980.17,3221.11 cw(c3986.18,3221.11) 3986.18,3227.11 4014.19,3227.11 cw(c4014.19,3221.11) 4020.2,3221.11 4020.2,3220.02 ccw(c4028.22,3220.02) 4028.22,3212 4056,3212 4095,3212 4135,3172 4345,3172 4433,3084 4696,3084 v1(4724,3112)
SD_D1: J16.8 R7.1 U2.29 | length 2232.5
  Top Layer w7.87: v1(3817,3552) 3849,3520 3849,3469.02 U2.29 ; R7.1 4667.5,3067.8 J16.8 4668.7,3069 4699,3069 4712,3082 4744,3082 4758,3096 4758,3150 4753,3155 v1(4724,3155)
  Bottom Layer w7.87: v1(3817,3552) 3787,3522 3787,3376 3856.19,3306.81 3961,3306.81 3979.45,3306.81 cw(c3979.45,3298.94) 3987.32,3298.94 3987.32,3276.8 ccw(c3993.3,3276.8) 3993.3,3270.82 4021.22,3270.82 ccw(c4021.22,3276.8) 4027.2,3276.8 4027.2,3350.83 cw(c4033.18,3350.83) 4033.18,3356.81 4061.09,3356.81 cw(c4061.09,3350.83) 4067.07,3350.83 4067.07,3276.8 ccw(c4073.05,3276.8) 4073.05,3270.82 4100.96,3270.82 ccw(c4100.96,3276.8) 4106.94,3276.8 4106.94,3350.83 cw(c4112.93,3350.83) 4112.93,3356.81 4140.84,3356.81 cw(c4140.84,3350.83) 4146.82,3350.83 4146.82,3276.8 ccw(c4152.8,3276.8) 4152.8,3270.82 4180.71,3270.82 ccw(c4180.71,3276.8) 4186.69,3276.8 4186.69,3350.83 cw(c4192.67,3350.83) 4192.67,3356.81 4220.59,3356.81 cw(c4220.59,3350.83) 4226.57,3350.83 4226.57,3299.51 ccw(c4232.55,3299.51) 4232.55,3293.53 4260.46,3293.53 ccw(c4260.46,3299.51) 4266.44,3299.51 4266.44,3350.83 cw(c4272.42,3350.83) 4272.42,3356.81 4300.33,3356.81 cw(c4300.33,3350.83) 4306.31,3350.83 4306.31,3314.68 ccw(c4314.19,3314.68) 4314.19,3306.81 4358,3306.81 4384.81,3280 4532,3280 4667,3145 4710.32,3145 4720.32,3155 v1(4724,3155)
SD_D2: J16.1 R6.1 U2.30 | length 2238.8
  Top Layer w7.87: v1(3817,3502) 3817,3473.19 U2.30 ; R6.1 4668.35,3371.8 J16.1 4708.9,3372.1 4709,3372 4746,3372 v1(4772,3398)
  Bottom Layer w7.87: v1(3817,3502) 3865,3454 3877,3454 3880.94,3454 ccw(c3880.94,3461.87) 3888.81,3461.87 3888.81,3518.02 cw(c3894.79,3518.02) 3894.79,3524 3922.7,3524 cw(c3922.7,3518.02) 3928.69,3518.02 3928.69,3389.98 ccw(c3934.67,3389.98) 3934.67,3384 3962.58,3384 ccw(c3962.58,3389.98) 3968.56,3389.98 3968.56,3518.02 cw(c3974.54,3518.02) 3974.54,3524 4002.45,3524 cw(c4002.45,3518.02) 4008.43,3518.02 4008.43,3389.98 ccw(c4014.41,3389.98) 4014.41,3384 4042.33,3384 ccw(c4042.33,3389.98) 4048.31,3389.98 4048.31,3518.02 cw(c4054.29,3518.02) 4054.29,3524 4082.2,3524 cw(c4082.2,3518.02) 4088.18,3518.02 4088.18,3389.98 ccw(c4094.16,3389.98) 4094.16,3384 4122.07,3384 ccw(c4122.07,3389.98) 4128.06,3389.98 4128.06,3495.21 cw(c4134.04,3495.21) 4134.04,3501.19 4161.95,3501.19 cw(c4161.95,3495.21) 4167.93,3495.21 4167.93,3461.87 ccw(c4175.8,3461.87) 4175.8,3454 4194,3454 4197.94,3454 ccw(c4197.94,3461.87) 4205.81,3461.87 4205.81,3473.02 cw(c4211.79,3473.02) 4211.79,3479 4239.7,3479 cw(c4239.7,3473.02) 4245.69,3473.02 4245.69,3461.87 ccw(c4253.56,3461.87) 4253.56,3454 4274,3454 4745,3454 4772,3427 v1(4772,3398)
SD_D3: J16.2 R5.1 U2.41 | length 2229.6
  Top Layer w7.87: R5.1 4667.65,3327.8 J16.2 4747.21,3328.79 4785,3291 4785,3079 4758,3052 v1(4724,3052)
  Top Layer w8.02: v1(3767,3021) 3743,3021 3692.1,3071.9 3692.1,3169.58 3728.72,3206.21 3831.11,3206.21 U2.41
  Bottom Layer w8.02: v1(3767,3021) 3765.32,3022.68 3749.32,3022.68 3726,3046 3726,3158 3749,3181 3792,3181 3836.03,3181 cw(c3836.03,3172.98) 3844.06,3172.98 3844.06,3162 ccw(c3850.06,3162) 3850.06,3156 3878.08,3156 ccw(c3878.08,3162) 3884.08,3162 3884.08,3183 cw(c3890.08,3183) 3890.08,3189 3918.1,3189 cw(c3918.1,3183) 3924.1,3183 3924.1,3162 ccw(c3930.11,3162) 3930.11,3156 3958.12,3156 ccw(c3958.12,3162) 3964.13,3162 3964.13,3183 cw(c3970.13,3183) 3970.13,3189 3998.15,3189 cw(c3998.15,3183) 4004.15,3183 4004.15,3162 ccw(c4010.15,3162) 4010.15,3156 4038.17,3156 ccw(c4038.17,3162) 4044.17,3162 4044.17,3172.98 cw(c4052.2,3172.98) 4052.2,3181 4088,3181 4097,3172 4120,3149 4336,3149 4422,3063 4708.14,3063 4719.14,3052 v1(4724,3052)
SWCLK: J13.2 U2.37 | length 817.7
  Top Layer w7.87: v1(3379.85,3537.04) 3399.85,3557.04 J13.2 ; v1(3459.22,3237.04) 3661.04,3237.04 3698.04,3274.04 3787.59,3274.04 U2.37
  Bottom Layer w7.87: v1(3379.85,3537.04) 3401,3515.89 3401,3398 3476,3323 3476,3253.82 v1(3459.22,3237.04)
SWDIO: J13.1 U2.34 | length 685.8
  Top Layer w7.87: J13.1 3439.22,3557.04 v1(3459.22,3537.04)
  Top Layer w8.02: v1(3615,3396) 3618.44,3399.44 3618.44,3408.44 3654.8,3444.8 3742.39,3444.8 3811.8,3375.39 3811.8,3367.03 U2.34
  Bottom Layer w7.87: v1(3459.22,3537.04) 3459.22,3426.04 3507.26,3378 3597,3378 v1(3615,3396)
USB_D_N: J1.5 J1.7 U2.32 | length 876.1
  Top Layer w8.02: J1.7 3168.51,3296.04 3145.42,3296.04 3138.76,3302.7 3138.76,3323.46 3146.91,3331.62 3168.51,3331.62 J1.5 3172.3,3331.62 3205.08,3331.62 3206.51,3330.18 3354.18,3330.18 3408.21,3384.21 3447.79,3384.21 3534.43,3470.85 3758.95,3470.85 3842.12,3387.68 3844.15,3387.68 3853.95,3377.88 U2.32
USB_D_P: J1.6 J1.8 U2.33 | length 839.6
  Top Layer w8.02: J1.8 3172.3,3276.35 3193.9,3276.35 3202.05,3284.5 3202.05,3305.3 3195.42,3311.93 ; J1.6 3172.3,3315.72 3205.08,3315.72 3206.51,3317.16 3359.57,3317.16 3413.6,3371.19 3453.19,3371.19 3539.82,3457.82 3753.56,3457.82 3832.91,3378.47 3832.91,3376.43 3842.71,3366.64 U2.33
pads on no net: J1. J1.3 J1.9 J13.4 J13.5 J16. J16.9 SW1.H U2.20 U2.21 U2.49

## Polygon pours and split planes (outlines as drawn)
+3V3A on Top Layer "+3V3A_L01_P017" (solid, pour order 17): 3302,3031 3288,3017 3246,3017 3242,3013 3242,2892 3244,2890 3283,2890 3286,2893 3286,2953 3287,2954 3346,2954 3355,2963 3355,3022 3346,3031
GND on Top Layer "GND_L01_P013" (solid, pour order 13): 4694,3173 4606,3173 4601,3178 4601,3208 4594,3215 4560,3215 4538,3237 4381,3237 4373,3229 4373,3171 4382,3162 4430,3162 4439,3153 4439,3095.17 4450,3086 4472,3086 4541,3086 4547,3092 4547,3131 4555,3139 4694,3139 4698,3143 4698,3169
+3V3 on Top Layer "+3V3_L01_P012" (solid, pour order 12): 4564,3223 4542,3245 4380,3245 4374,3251 4374,3340 4378,3344 4519,3344 4524,3349 4524,3387 4530,3393 4587,3393 4592,3388 4592,3266 4599,3259 4698,3259 4701,3256 4701,3228 4696,3223
+5 on Top Layer "+5_L01_P008" (solid, pour order 8): 3152,3410 3207,3410 3220,3423 3220,3491 3229,3500 3307,3500 3318,3489 3318,3415 3311,3408 3253,3408 3232,3387 3154,3387 3150,3391 3150,3408
+5 on Top Layer "+5_L01_P004" (solid, pour order 4): 3208,3221 3225,3204 3388,3204 3400,3192 3400,3126 3395,3121 3377,3121 3363,3107 3363,3046 3359,3042 3310,3042 3305,3047 3305,3124 3293,3136 3226,3136 3217,3145 3217,3183 3203,3197 3148,3197 3148,3220 3149,3221
GND on Top Layer "GND_L01_P005" (solid, pour order 5): 3199,3189 3208,3180 3208,3141 3224,3125 3288.1,3125 3294,3119.1 3294,3071 3294,3038 3281,3025 3237,3025 3231,3019 3231,2990.34 3225.47,2984.8 3165.47,2984.8 3162,2988.27 3162,3018 3166,3022 3191,3022 3196,3027 3196,3080 3189,3087 3100,3087 3087,3100 3087,3180 3096,3189
+3V3 on Top Layer "+3V3_L01_P000" (solid, pour order 0): 3372,2946 3372,2909 3376,2905 3535,2905 3542,2912 3542,3042 3553,3053 3553,3103 3546,3110 3380,3110 3372,3102
GND on Top Layer "GND_L01_P002" (solid, pour order 2): 3411,3127 3418,3120 3551,3120 3564,3107 3564,3046 3554,3036 3554,2966 3559,2961 3613,2961 3617,2965 3617,3177 3609,3185 3420,3185 3411,3176
GND on Int1 (GND) "GND_L02_P014" (solid, pour order 14): 2883.58,3802 5250,3802 5250,2817 5247,2820 2886.58,2820
+5 on Int2 (PWR) "+5_L03_P015" (solid, pour order 15): 3227.12,3505 3391,3505 3403,3493 3403,3049 3393,3039 3289,3039 3279,3049 3279,3199 3289,3209 3318.66,3209 3334,3224.34 3334,3398.12 3320.12,3412 3227,3412 3218,3421 3218,3493.93
+3V3 on Int2 (PWR) "+3V3_L03_P016" (solid, pour order 16): 2884,3802 5250,3802 5250,2815 5248,2817 2886,2817

## Silkscreen, mask and mechanical layers (free items; w line width, h text height)
Top Overlay:
  text "RST" at 2941.47,3643.8 h40 r270
  text "PA0" at 4260.47,3307.8 h40
  text "+3V3" at 2902.47,3037.8 h40
  text "REV 1.0/A" at 2910,2925.81 h40
  text "CONICS" at 2910,2865 h50
Bottom Overlay:
  text "+5V" at 3608.47,3676.8 h40 r90
  text "+5V" at 3712.47,3674.8 h40 r90
  text "PA5" at 4514.47,3673.8 h40 r90
  text "PA4" at 4614.47,3672.8 h40 r90
  text "PA3" at 4707.47,3672.8 h40 r90
  text "PA12" at 4105.47,3671.8 h40 r90
  text "PA0" at 4311.47,3671.8 h40 r90
  text "PA7" at 4406.47,3671.8 h40 r90
  text "+3V3" at 4820.47,3671.8 h40 r90
  text "PA10" at 3789.47,3670.8 h40 r90
  text "PA13" at 4047.47,3670.8 h40 r90
  text "PA1" at 4209.47,3670.8 h40 r90
  text "PA14" at 3921.47,3668.8 h40 r90
  text "+3V3" at 4908.47,3667.8 h40 r90
  text "GND" at 5011,3665 h40 r90
  text "GND" at 5110,3664 h40 r90
  text "SWDIO" at 3487.47,3562.8 h40 r90
  text "SWCLK" at 3425.47,3560.8 h40 r90
  text "GND" at 3368.47,3558.8 h40 r90
  text "PC14" at 4409.47,3080.8 h40 r90
  text "+3V3" at 4810.47,3080.8 h40 r90
  text "+3V3" at 4910.47,3080.8 h40 r90
  text "PC13" at 4311.47,3079.8 h40 r90
  text "PC15" at 4508.47,3078.8 h40 r90
  text "+3V3" at 3571.47,3077.8 h40 r90
  text "PB15" at 3708.47,3072.8 h40 r90
  text "PB7" at 4015.47,3045.8 h40 r90
  text "PB8" at 4113.47,3044.8 h40 r90
  text "PB9" at 4215.47,3044.8 h40 r90
  text "PB3" at 3829.47,3038.8 h40 r90
  text "GND" at 5111.47,3037.8 h40 r90
  text "GND" at 5009.47,3036.8 h40 r90
  text "PA2" at 4709.47,3035.8 h40 r90
  text "PB6" at 3910.47,3034.8 h40 r90
  text "PA1" at 4606.47,3034.8 h40 r90
Board Shape:
  the board outline again, w2